# Altium PCB 131902115-潘怡君-PCB.PcbDoc
Units mil, origin at the board's own origin, x right, y up, seen from the top; angles counter-clockwise.
Board outline 5150 x 4030 mil, 2 copper layers (Top Layer, Bottom Layer); 38 components, 50 nets, 342 pads, 0 vias.
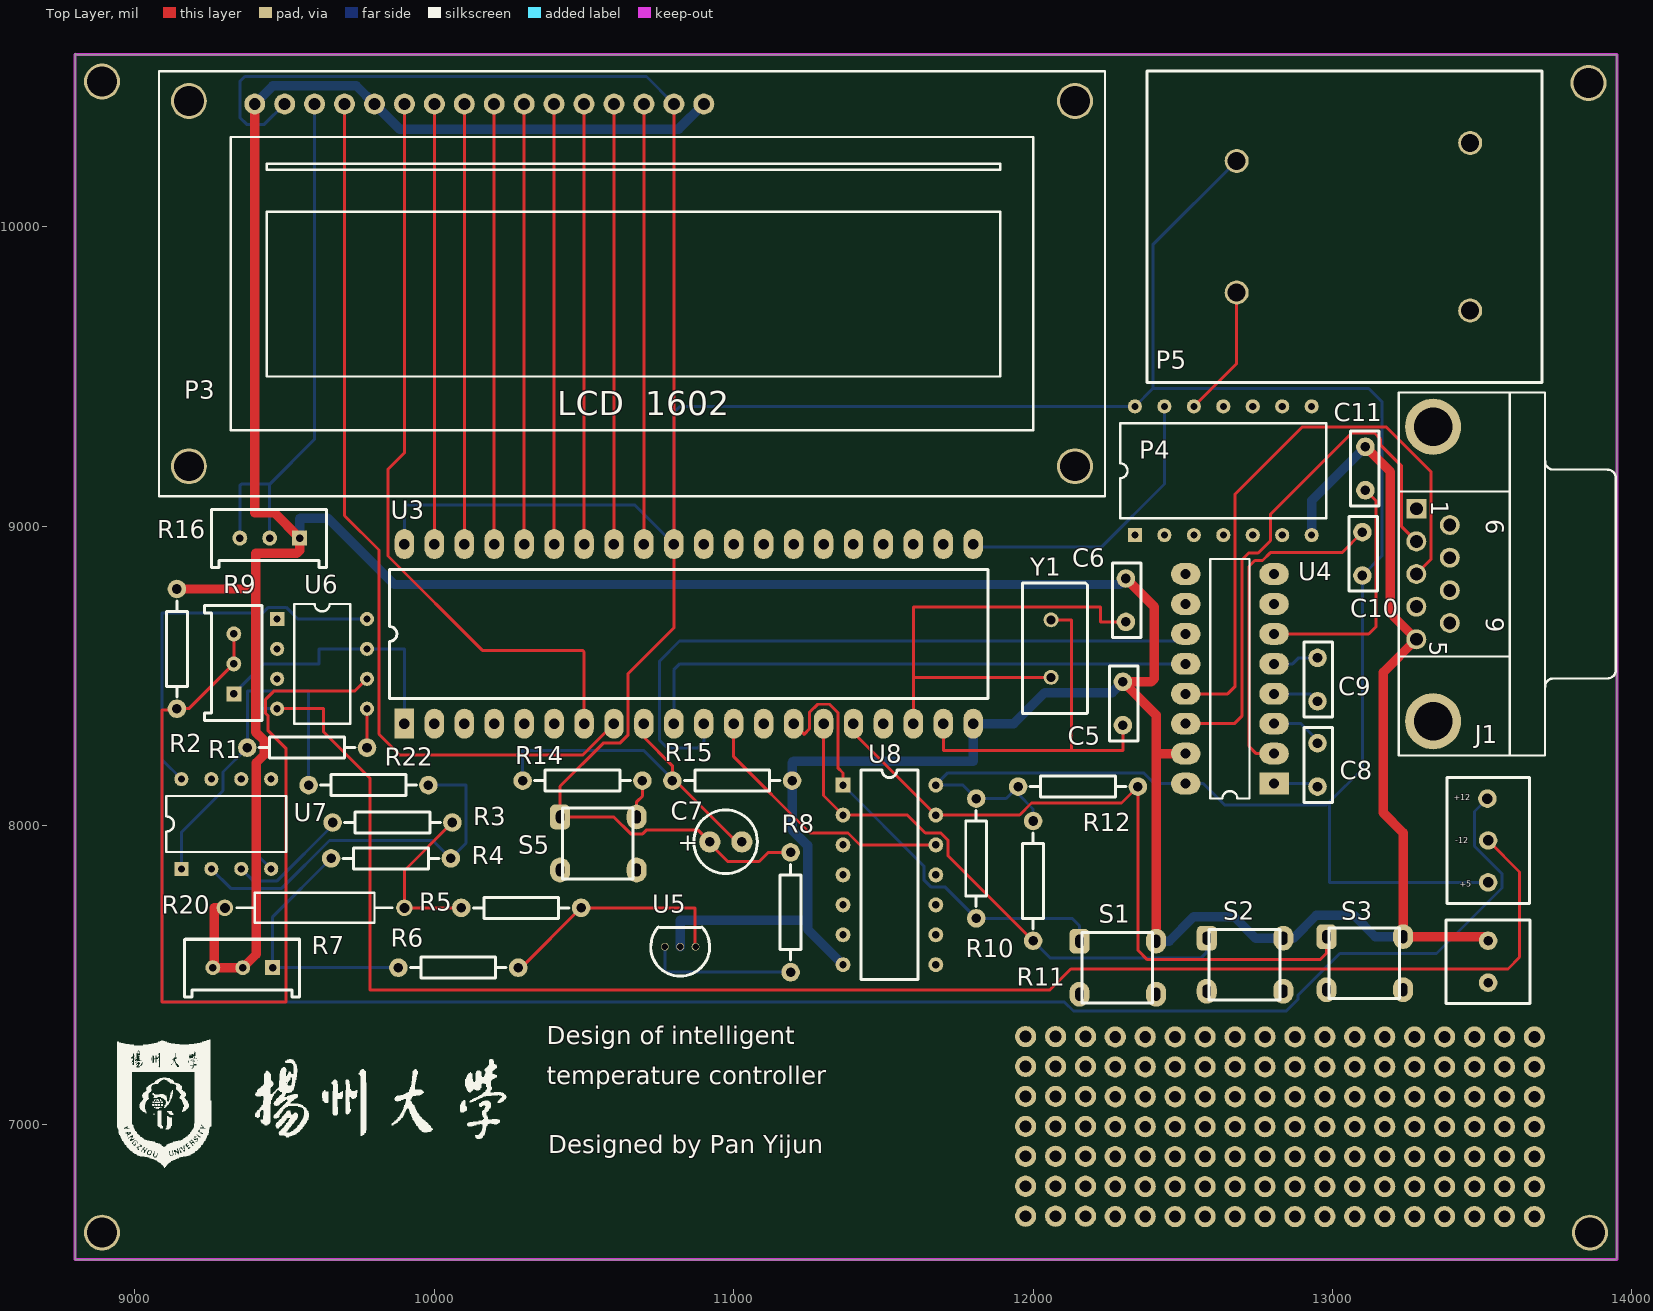
[diagram p0: Top Layer view]
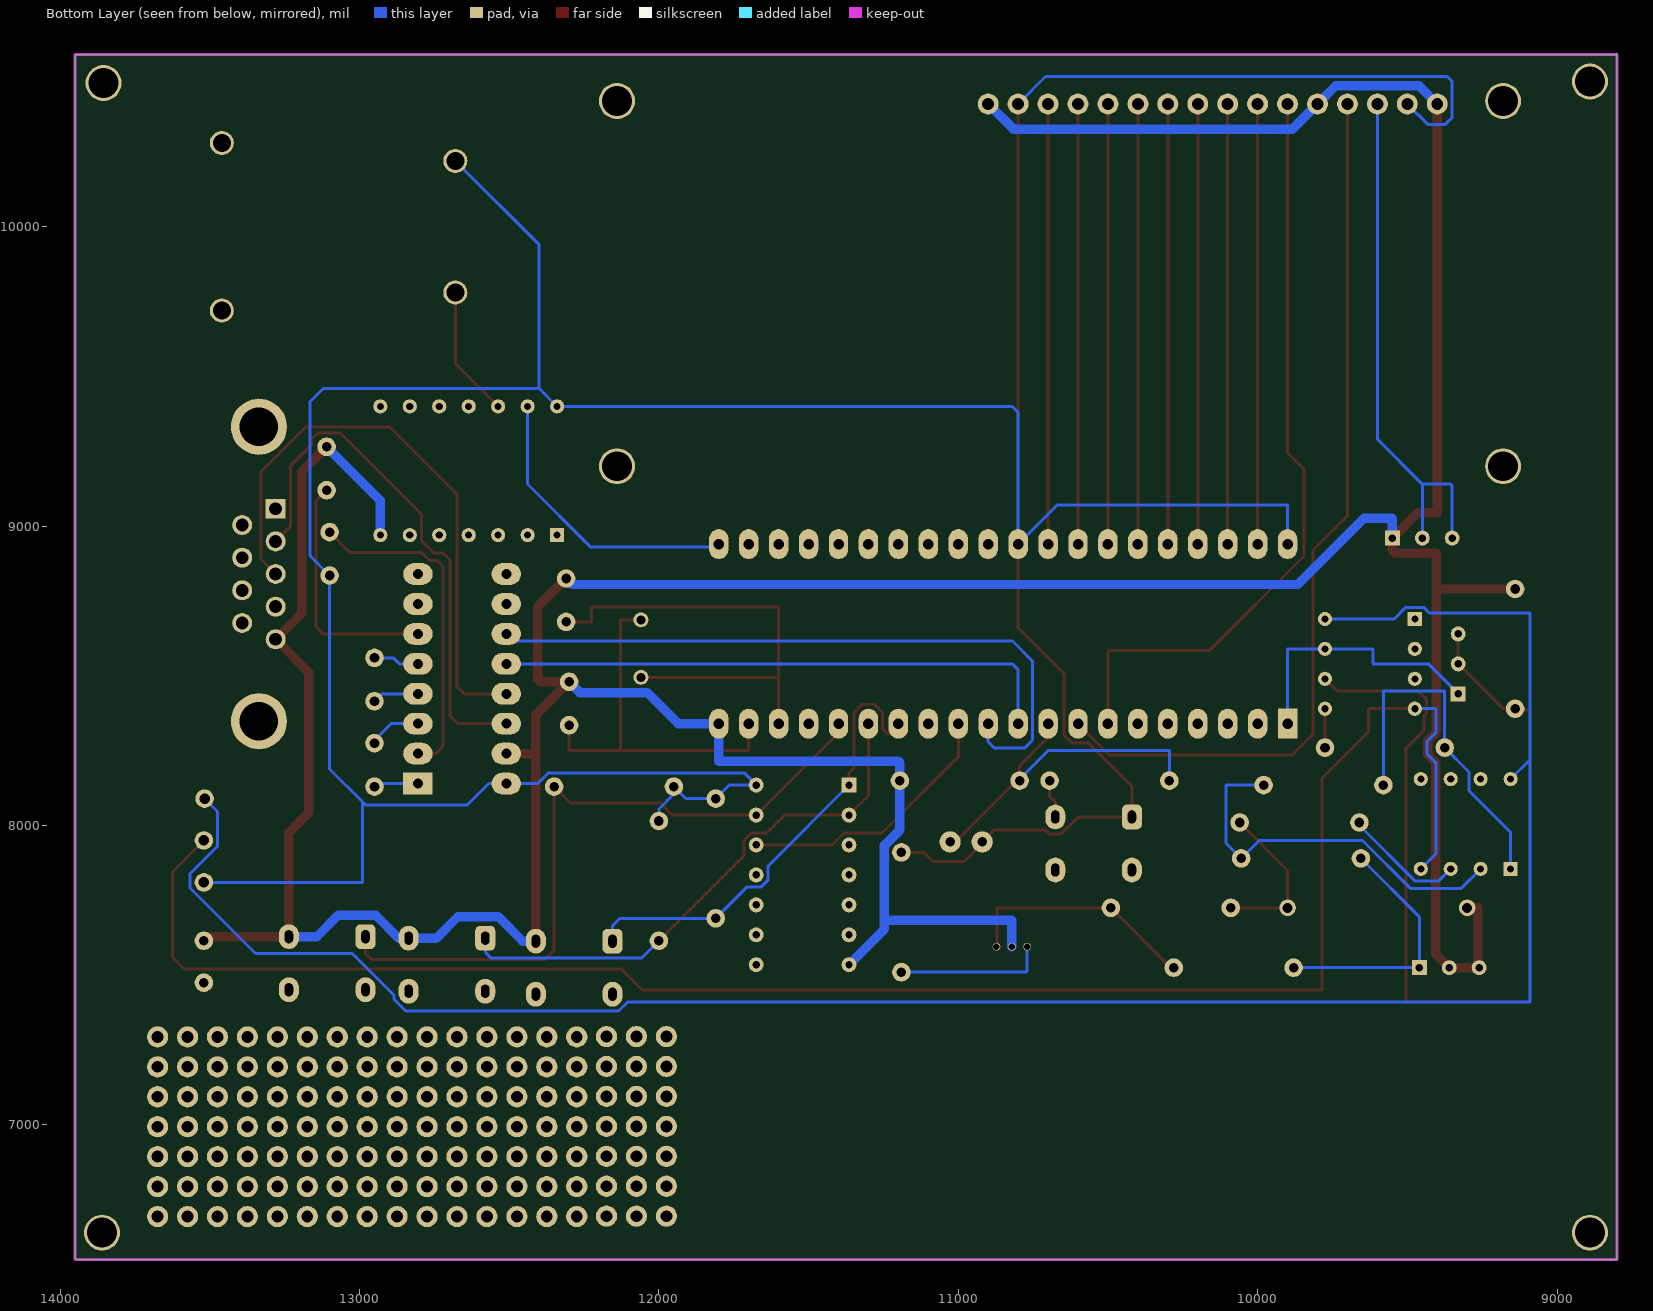
[diagram p1: Bottom Layer view, seen from below]

## Layer stack, top to bottom
Top Solder: solder mask 0.4, Solder Resist, Dk 3.5
Top Layer: signal copper 1.4
Dielectric 1: dielectric 12.6, FR-4, Dk 4.8
Bottom Layer: signal copper 1.4
Bottom Solder: solder mask 0.4, Solder Resist, Dk 3.5

## Board outline
8800,10580 8805,10575 13950,10575 13950,6555 13945,6550 8800,6550

## Design rules (kind name [scope] priority, off if disabled: settings)
Clearance [All] p1: gap=10
PolygonConnect [All] p1: connectstyle=Relief reliefconductorwidth=10 reliefentries=4 polygonreliefangle="90 Angle" airgapwidth=10
RoutingVias [All] p1: holewidth=28 width=50 viastyle="Through Hole" minholewidth=28 minwidth=50 maxholewidth=28 maxwidth=50
SolderMaskExpansion [All] p1: expansion=4
Width [InNet('GND')] p1: maxlimit=31.5 minlimit=31.5 preferedwidth=31.5 minimp=50.000000 maximp=50.000000 favimp=50.000000
30 further rules are at their usual default settings.

## Classes and differential pairs
component class 2: C5 C6 C7 C8 C9 C10 C11 J1 P3 P4 P5 R1 R3 R4 R5 R6 R7 R8 R9 R10 R11 R12 R14 R15 R16 R20 R22 S1 S2 S3 S5 U4 U5 U6 U7 U8

## Components (designator, comment, footprint, x,y, rotation, side; value= is the part's Value field where it differs from the comment)
C5 "Cap" dianrong 14115,9275 r270 top
C6 "Cap" dianrong 14125,9620 r270 top
C7 "Cap2" dianjiedianrong1/22uF 10920,7945 r0 top
C8 "" dianrong 14765,9070 r270 top
C9 "" dianrong 14765,9355 r270 top
C10 "" dianrong 14915,9775 r270 top
C11 "" dianrong 11295,8325 r90 top
J1 "D Connector 9" DSUB1.385-2H9 13710,8840 r270 top
P3 "LDC1602" "LCD 1602" 10660,9810 r0 top
P4 "74LS06" 7406 12340,8970 r90 top
P5 "SSR-25DA" ssr 13700,10520 r180 top
R1 "Res2" dianzu#1 9775,8260 r180 top
R2 "Res2" dianzu#2 9140,8390 r90 top
R3 "Res2" dianzu#1 9660,8010 r0 top
R4 "Res2" dianzu#1 10055,7890 r180 top
R5 "Res2" dianzu#1 10490,7725 r180 top
R6 "Res2" dianzu#1 10280,7525 r180 top
R7 "RPot" dianweqi 9310,7580 r180 top
R8 "Res2" dianzu#2 11190,7910 r270 top
R9 "RPot" dianweqi 9385,8590 r90 top
R10 "Res2" dianzu#2 11810,7690 r90 top
R11 "Res2" dianzu#2 12000,7615 r90 top
R12 "Res2" dianzu#2 12350,8130 r180 top
R14 "Res2" dianzu#2 10695,8150 r180 top
R15 "Res2" dianzu#2 11195,8150 r180 top
R16 "RPot" dianweqi 9400,9015 r180 top
R20 "Pt100" AXIAL-0.6 9600,7725 r180 top
R22 "Res2" dianzu#3 9980,8135 r180 top
S1 "SW-PB" anniu 12155,7525 r0 top
S2 "SW-PB" anniu 12580,7535 r0 top
S3 "SW-PB" anniu 12980,7540 r0 top
S5 "SW-PB" anniu 10420,7940 r0 top
U3 "STC12C5A60S2" "DIP40 - duplicate" 9900,8340 r90 top
U4 "MAX232ACPE" MAX232 12805,8140 r180 top
U5 "TL431ACLP" tl431 10770,7595 r0 top
U6 "LM358D" lm358 9475,8690 r0 top
U7 "LM358D" lm358 9155,7855 r90 top
U8 "74LS11" 74ls11 11365,8135 r0 top

## Footprints (in the part's own frame and the unit in brackets; to place one, negate y for a bottom-side part, rotate by r counter-clockwise, add the part's x,y. Pads: shape width x height; smd on the part's side, far side on the other; paste and mask are expansions set on the pad)
74ls11 [mil]
  rect 50x50 hole 25: 1(0,0)
  round 50 hole 25: 2(0,-100) 3(0,-200) 4(0,-300) 5(0,-400) 6(0,-500) 7(0,-600) 8(310,-600) 9(310,-500) 10(310,-400) 11(310,-300) 12(310,-200) 13(310,-100) 14(310,0)
  silkscreen extent 60,-650 250,50
7406 [mm]
  rect 1.2x1.2 hole 0.6: 1(0,0)
  round 1.2 hole 0.6: 2(0,-2.5) 3(0,-5) 4(0,-7.5) 5(0,-10) 6(0,-12.5) 7(0,-15) 8(10.92,-15) 9(10.92,-12.5) 10(10.92,-10) 11(10.92,-7.5) 12(10.92,-5) 13(10.92,-2.5) 14(10.92,0)
  silkscreen extent 1.43,-16.25 9.49,1.25
anniu [mm]
  rrect50% 1.7x2.1 hole 0.7 slot 1.1 at 90 deg: 1(0,2.25)
  oval 1.7x2.1 hole 0.7 slot 1.1 at 90 deg: 2(6.5,2.25) 3(0,-2.25) 4(6.5,-2.25)
  silkscreen extent 0.2,-3 6.2,3
AXIAL-0.6 [mm] "Variable Resistor; 2 Leads"
  round 1.4 hole 0.85: 1(-7.62,0) 2(7.62,0)
  silkscreen extent -6.6,-1.27 6.6,1.27
dianjiedianrong1/22uF [mm]
  round 1.8 hole 0.8: 1(0,0) 2(2.727,0)
  silkscreen extent -1.36,-2.69 4.04,2.71
dianrong [mil]
  round 62 hole 32: 1(795,-1815) 2(940,-1815)
  silkscreen extent 742,-1860 992,-1765
dianweqi [mil]
  rect 50x50 hole 25: 1(-150,55)
  round 50 hole 25: 2(-50,55) 3(50,55)
  silkscreen extent -240,-40 145,153
dianzu#1 [mil]
  round 62 hole 32: 1(0,0) 2(400,0)
  silkscreen extent 40,-35 360,35
dianzu#2 [mil]
  round 62 hole 32: 1(0,0) 1(400,0)
  silkscreen extent 40,-35 360,35
dianzu#3 [mil]
  round 62 hole 32: 1(400,0) 2(0,0)
  silkscreen extent 40,-35 360,35
"DIP40 - duplicate" [mil]
  rect 100x65 hole 35: 1(0,0)
  oval 100x65 hole 35: 2(0,-100) 3(0,-200) 4(0,-300) 5(0,-400) 6(0,-500) 7(0,-600) 8(0,-700) 9(0,-800) 10(0,-900) 11(0,-1000) 12(0,-1100) 13(0,-1200) 14(0,-1300) 15(0,-1400) 16(0,-1500) 17(0,-1600) 18(0,-1700) 19(0,-1800) 20(0,-1900) 21(600,-1900) 22(600,-1800) 23(600,-1700) 24(600,-1600) 25(600,-1500) 26(600,-1400) 27(600,-1300) 28(600,-1200) 29(600,-1100) 30(600,-1000) 31(600,-900) 32(600,-800) 33(600,-700) 34(600,-600) 35(600,-500) 36(600,-400) 37(600,-300) 38(600,-200) 39(600,-100) 40(600,0)
  silkscreen extent 85,-1950 515,50
DSUB1.385-2H9 [mm] "Connector; D Subminiature; 9 Position; Right Angle; Pitch 1.385 mm"
  rect 1.69x1.69 hole 1.09: 1(-5.54,-10.92)
  round 1.69 hole 1.09: 2(-2.77,-10.92) 3(0,-10.92) 4(2.77,-10.92) 5(5.54,-10.92) 6(-4.155,-8.08) 7(-1.385,-8.08) 8(1.385,-8.08) 9(4.155,-8.08)
  round 4.76 hole 3.26: 10(-12.495,-9.5) 11(12.495,-9.5)
  silkscreen extent -15.4,-12.4 15.4,6
"LCD 1602" [mil] "www.ouravr.com"
  round 120 hole 100: 0(-1480,-610) 0(-1480,610) 0(1480,-610) 0(1480,610)
  round 70 hole 40: 1(-1260,600) 2(-1160,600) 3(-1060,600) 4(-960,600) 5(-860,600) 6(-760,600) 7(-660,600) 8(-560,600) 9(-460,600) 10(-360,600) 11(-260,600) 12(-160,600) 13(-60,600) 14(40,600) 15(140,600) 16(240,600)
  silkscreen extent -1580,-710 1580,710
lm358 [mm]
  rect 1.2x1.2 hole 0.6: 1(0,0)
  round 1.2 hole 0.6: 2(0,-2.54) 3(0,-5.08) 4(0,-7.62) 5(7.62,-7.62) 6(7.62,-5.08) 7(7.62,-2.54) 8(7.62,0)
  silkscreen extent 1.43,-8.89 6.19,1.27
MAX232 [mm]
  rect 2.5x1.85 hole 0.85: 1(0,0)
  oval 2.5x1.85 hole 0.85: 2(0,-2.54) 3(0,-5.08) 4(0,-7.62) 5(0,-10.16) 6(0,-12.7) 7(0,-15.24) 8(0,-17.78) 9(7.5,-17.78) 10(7.5,-15.24) 11(7.5,-12.7) 12(7.5,-10.16) 13(7.5,-7.62) 14(7.5,-5.08) 15(7.5,-2.54) 16(7.5,0)
  silkscreen extent 2.08,-19.05 5.41,1.27
ssr [mil]
  round 80 hole 60: 0(240,240) 1(240,800) 2(1020,300) 3(1020,740)
  silkscreen extent 0,0 1320,1040
tl431 [mm]
  round 0.65 hole 0.55: 1(2.6,0) 2(1.3,0) 3(0,0)
  silkscreen extent -1.2,-2.5 3.8,1.69

## Part data
C5 C6 C7: "Capacitor"
C8 C9 C10 C11: library part Cap, "Capacitor"
J1: "Receptacle Assembly, 9 Position, Right Angle"
P3: library part "Header 16", "Header, 16-Pin"
P4: library part "Header 7X2", "Header, 7-Pin, Dual row"
P5: library part "Header 2X2", "Header, 2-Pin, Dual row"
R1 R2 R3 R4 R5 R6 R8 R10 R11 R12 R14 R15 R22: "Resistor"
R7 R9 R16: "Potentiometer"
R20: library part "Res Adj2", "Variable Resistor"
S1 S2 S3 S5: "Switch"
U3: library part AT89C52, "8-Bit Microcontroller with 8K Flash ROM"
U4: "+5V Powered, Multi-Channel RS-232 Driver/Receiver"
U5: "Programmable Precision Reference"
U6 U7: "Dual Low-Power Operational Amplifier"
U8: library part AND3, "3-Input AND Gate, Single Pin Version"

## Free pads (board coordinates)
  round 50 hole 30: 1(12060,8495) 2(12060,8687.13)
  round 62 hole 32: 1(13520,7475) 2(13520,7615)
  round 62 hole 35: 1(13520,7810) 2(13520,7950) 3(13517.5,8090)
  round 70.87 hole 39.37: 41(11975,6695) 41(12075,6695) 41(12175,6695) 41(12274.41,6693.9) 41(12374.41,6693.9) 41(12474.41,6693.9) 41(12574.41,6693.9) 41(12674.41,6693.9) 41(12774.41,6693.9) 41(12874.41,6693.9) 41(12974.41,6693.9) 41(13074.41,6693.9) 41(13174.41,6693.9) 41(13274.41,6693.9) 41(13374.41,6693.9) 41(13474.41,6693.9) 41(13574.41,6693.9) 41(13674.41,6693.9) 42(11975,6795) 42(12075,6795) 42(12175,6795) 42(12274.41,6793.9) 42(12374.41,6793.9) 42(12474.41,6793.9) 42(12574.41,6793.9) 42(12674.41,6793.9) 42(12774.41,6793.9) 42(12874.41,6793.9) 42(12974.41,6793.9) 42(13074.41,6793.9) 42(13174.41,6793.9) 42(13274.41,6793.9) 42(13374.41,6793.9) 42(13474.41,6793.9) 42(13574.41,6793.9) 42(13674.41,6793.9) 43(11975,6895) 43(12075,6895) 43(12175,6895) 43(12274.41,6893.9) 43(12374.41,6893.9) 43(12474.41,6893.9) 43(12574.41,6893.9) 43(12674.41,6893.9) 43(12774.41,6893.9) 43(12874.41,6893.9) 43(12974.41,6893.9) 43(13074.41,6893.9) 43(13174.41,6893.9) 43(13274.41,6893.9) 43(13374.41,6893.9) 43(13474.41,6893.9) 43(13574.41,6893.9) 43(13674.41,6893.9) 44(11975,6995) 44(12075,6995) 44(12175,6995) 44(12274.41,6993.9) 44(12374.41,6993.9) 44(12474.41,6993.9) 44(12574.41,6993.9) 44(12674.41,6993.9) 44(12774.41,6993.9) 44(12874.41,6993.9) 44(12974.41,6993.9) 44(13074.41,6993.9) 44(13174.41,6993.9) 44(13274.41,6993.9) 44(13374.41,6993.9) 44(13474.41,6993.9) 44(13574.41,6993.9) 44(13674.41,6993.9) 45(11975,7095) 45(12075,7095) 45(12175,7095) 45(12274.41,7093.9) 45(12374.41,7093.9) 45(12474.41,7093.9) 45(12574.41,7093.9) 45(12674.41,7093.9) 45(12774.41,7093.9) 45(12874.41,7093.9) 45(12974.41,7093.9) 45(13074.41,7093.9) 45(13174.41,7093.9) 45(13274.41,7093.9) 45(13374.41,7093.9) 45(13474.41,7093.9) 45(13574.41,7093.9) 45(13674.41,7093.9) 46(11975,7195) 46(12075,7195) 46(12175,7195) 46(12274.41,7193.9) 46(12374.41,7193.9) 46(12474.41,7193.9) 46(12574.41,7193.9) 46(12674.41,7193.9) 46(12774.41,7193.9) 46(12874.41,7193.9) 46(12974.41,7193.9) 46(13074.41,7193.9) 46(13174.41,7193.9) 46(13274.41,7193.9) 46(13374.41,7193.9) 46(13474.41,7193.9) 46(13574.41,7193.9) 46(13674.41,7193.9) 47(11975,7295) 47(12075,7295) 47(12175,7295) 47(12274.41,7293.9) 47(12374.41,7293.9) 47(12474.41,7293.9) 47(12574.41,7293.9) 47(12674.41,7293.9) 47(12774.41,7293.9) 47(12874.41,7293.9) 47(12974.41,7293.9) 47(13074.41,7293.9) 47(13174.41,7293.9) 47(13274.41,7293.9) 47(13374.41,7293.9) 47(13474.41,7293.9) 47(13574.41,7293.9) 47(13674.41,7293.9)
  round 120 hole 100: 48(8890,10485) 49(13855,10480) 51(13860,6640) 52(8890,6640)

## Nets (pads, with @x,y where several pads share a name; then routed paths per layer and width w, separated by ;. In a path a pad name is that pad's centre, name@x,y a point inside that pad or via, vN(x,y) a via of type N, cw(c..) or ccw(c..) an arc to the next point about the centre after c; other vN are vias at no path point)
GND: C5.1 C6.1 C11.2 J1.5 P3.1 P3.5 P3.16 P4.7 pad.2@13520,7615 R2.1@9140,8790 R7.2 R7.3 R15.1@11195,8150 R16.1 R20.2 S1.2 S2.2 S3.2 U3.20 U4.15 U5.2 U8.7 | length 15746.9
  Top Layer w31.5: R2.1@9140,8790 9398,8790 9403,8795 ; R20.2 9265,7725 9265,7530 R7.3 R7.2 9405,7570 9405,8209.75 9431.75,8236.49 9431.75,8283.51 9403,8312.25 9403,8795 ; P3.1 9400,9045 9465,9045 R16.1 9550,8918.5 9540.75,8909.25 9403,8909.25 9403,8795 ; C6.1 12405,8730 12405,8490 12395,8480 C5.1 12410.91,8369.09 S1.2 ; 12415,8240 U4.15 ; C11.2 13193,9182 13193,8708.97 J1.5 13170,8511.81 13170,8041.91 13235.91,7976 S3.2 13506.42,7628.58 pad.2@13520,7615
  Bottom Layer w31.5: P3.1 9460.75,10470.75 9739.25,10470.75 P3.5 9884,10326 10816,10326 P3.16 ; R16.1 9550,9025 9552,9027 9644,9027 9866,8805 12290,8805 C6.1 ; U5.2 10821.18,7683.82 11242.93,7683.82 11246.75,7680 ; U8.7 11246.75,7653.25 11246.75,7680 ; C5.1 12264,8444 12039,8444 11935,8340 U3.20 11800,8215 11200,8215 11195,8210 11195,8150 11195,7985.25 11246.75,7933.51 11246.75,7680 ; S1.2 12454.58,7613.58 12536,7695 12671.58,7695 12743,7623.58 S2.2 12869.58,7623.58 12946,7700 13071.58,7700 13143,7628.58 S3.2 ; P4.7 12930.55,9085.55 C11.2
NetC1_1: R9.1 U3.1 U6.7 | length 911.4
  Bottom Layer w10: R9.1 9430,8540 9615,8540 9615,8590 U6.7 9900,8590 U3.1
NetC1_2: P3.6 U3.7 | length 2560.3
  Top Layer w10: P3.6 9900,9245 9845,9190 9845,8900 10160,8585 10495,8585 10500,8580 U3.7
NetC2_2: P3.4 U3.8 | length 3010.1
  Top Layer w10: P3.4 9700,9035 9815,8920 9815,8305 9885,8235 10495,8235 U3.8
NetC5_2: C5.2 pad.2@12060,8687.13 U3.19 | length 1280
  Top Layer w10: U3.19 11700,8250 12300,8250 C5.2 ; pad.2@12060,8687.13 12127.87,8687.13 12127.87,8250
NetC6_2: C6.2 pad.1@12060,8495 U3.18 | length 1610
  Top Layer w10: U3.18 11600,8495 ; pad.1@12060,8495 11600,8495 ; C6.2 12225,8680 12225,8730 11600,8730 11600,8495
NetC7_2: C7.2 R14.1@10295,8150 R15.1@10795,8150 U3.9 | length 1191
  Top Layer w10: U3.9 10700,8295 10795,8200 10795,8150 10805,8150 11010,7945 C7.2
  Bottom Layer w10: R14.1@10295,8150 10295,8250 10700,8250 10795,8155 R15.1@10795,8150
NetC8_1: C8.1 U4.3 | length 174.9
  Bottom Layer w10: U4.3 12895,8340 C8.1@12955,8280
NetC8_2: C8.2 U4.1 | length 149.1
  Bottom Layer w10: U4.1 12940,8140 C8.2
NetC9_1: C9.1 U4.5 | length 153.3
  Bottom Layer w10: U4.5 12867,8540 12887,8560 C9.1
NetC9_2: C9.2 U4.4 | length 155.4
  Bottom Layer w10: U4.4 12925,8440 C9.2
NetC10_1: C10.1 U4.2 | length 1121.4
  Top Layer w10: U4.2 12745.79,8240 12720.79,8265 12720.79,8865 12740.79,8885 12765.9,8885 12792.32,8911.42 13031.42,8911.42 C10.1
NetC11_1: C11.1 U4.6 | length 821.3
  Top Layer w10: U4.6 13121,8640 13146,8665 13146,9084 C11.1
NetD1_1: pad.3 U6.8 U7.8 | length 7122.4
  Bottom Layer w10: U7.8 9090,8220 ; U6.8 9543.46,8690 9504.84,8728.62 9445.16,8728.62 9426.54,8710 9090,8710 9090,8220 ; pad.3 13474,8046.5 13474,7930.95 13566,7838.95 13566,7790.95 13347.3,7572.24 13024.41,7572.24 12884.37,7432.2 12884.37,7418.47 12845.98,7380.08 12134.93,7380.08 12105,7410 9090,7410 9090,8220
NetD1_2: pad.2@13520,7950 U6.4 U7.4 | length 6128.8
  Top Layer w10: U6.4 9630,8390 9630,8313 9785,8158 9785,7450 12055,7450 12126,7521 13586,7521 13625,7560 13625,7845 pad.2@13520,7950
  Bottom Layer w10: U7.4 9405,7905 9405,8210 9435,8240 9435,8280 9405,8310 9405,8390 U6.4
NetD1_3: 
NetD1_4: 
NetF?_1: 
NetJ1_2: J1.2 U4.14 | length 1810.1
  Top Layer w10: U4.14 12672,8340 12697,8365 12697,8887 12720,8910 12751.62,8910 12793,8951.38 12793,9040 13064,9311 13140,9311 13161,9290 13161,9270 13231,9200 13231,8998.13 J1.2
NetJ1_3: J1.3 U4.13 | length 1988.4
  Top Layer w10: U4.13 12650,8440 12675,8465 12675,9107 12899,9331 13180,9331 13329,9182 13329,8888.92 J1.3
NetP3_3: P3.3 R16.2 R16.3 | length 1789.2
  Bottom Layer w10: R16.3 9350,9135 9355,9140 9450,9140 ; R16.2 9450,9140 ; P3.3 9600,9290 9450,9140
NetP3_7: P3.7 U3.39 | length 1470
  Top Layer w10: U3.39 P3.7
NetP3_8: P3.8 U3.38 | length 1470
  Top Layer w10: U3.38 P3.8
NetP3_9: P3.9 U3.37 | length 1470
  Top Layer w10: U3.37 P3.9
NetP3_10: P3.10 U3.36 | length 1470
  Top Layer w10: U3.36 P3.10
NetP3_11: P3.11 U3.35 | length 1470
  Top Layer w10: U3.35 P3.11
NetP3_12: P3.12 U3.34 | length 1470
  Top Layer w10: U3.34 P3.12
NetP3_13: P3.13 U3.33 | length 1470
  Top Layer w10: U3.33 P3.13
NetP3_14: P3.14 U3.32 | length 1470
  Top Layer w10: U3.32 P3.14
NetP4_11: P4.11
NetP4_13: P4.13 U3.21 | length 994.5
  Bottom Layer w10: U3.21 11800,8931 12229,8931 12439,9141 12439,9399.92 P4.13
NetP5_2: P4.12 P5.3 | length 439.4
  Top Layer w10: P4.12 12680,9543.07 P5.3
NetR1_1: R1.1 U6.5 | length 130
  Top Layer w10: R1.1 U6.5
NetR1_2: R1.2 R22.1 U7.1 | length 1206.1
  Bottom Layer w10: U7.1 9155,7977.76 9293.62,8116.38 9293.62,8178.62 R1.2 9375,8450 9580,8450 R22.1
NetR2_1: 
NetR3_1: R3.1 U7.3 | length 408.2
  Bottom Layer w10: U7.3 9395,7815 9475,7815 9660,8000 R3.1
NetR3_2: R3.2 R5.2 R20.1 | length 541.3
  Top Layer w10: R3.2 9900,7850 R20.1 R5.2
NetR4_1: R4.1 R22.2 U7.2 | length 1310.2
  Bottom Layer w10: U7.2 9320,7790 9489.95,7790 9649.95,7950 9995,7950 R4.1 10106,7941 10106,8135 R22.2
NetR4_2: R5.1 R6.1 U5.1 | length 803.8
  Top Layer w10: R6.1 10290,7525 R5.1 10870,7725 10870,7597.36 U5.1
NetR5_2: R8.1@11190,7510 U5.3 | length 502.1
  Bottom Layer w10: U5.3 10770,7515 10775,7510 R8.1@11190,7510
NetR9_2: R2.1@9140,8390 R9.2 R9.3 U6.6 | length 3201.1
  Top Layer w10: R9.3 R9.2 9180,8390 9140,8390 9135,8385 9090,8385 9090,7410 9505,7410 9505,8256.38 9445,8316.38 9445,8365.38 9436.38,8374 9436.38,8421.38 9465,8450 9735,8450 U6.6
NetR10_1: R10.1@11810,7690 S1.1 U3.14 U8.1 | length 1560.3
  Top Layer w10: U3.14 11235.27,8304.73 11252.5,8321.97 11252.5,8377.18 11280.32,8405 11319.68,8405 11347.5,8377.18 11347.5,8192.5 11365,8175 U8.1
  Bottom Layer w10: U8.1 11635,7865 11635,7818.43 11658.43,7795 11705,7795 11810,7690 12130,7690 12155,7665 S1.1
NetR11_1: R11.1@12000,7615 S2.1 U3.15 U8.2 | length 1830
  Top Layer w10: U3.15 11300,8100 U8.2 11580,8035 11640,7975 11691.57,7975 11715,7951.57 11715,7900 R11.1@12000,7615
  Bottom Layer w10: R11.1@12000,7615 12058,7557 12560,7557 12580,7577 S2.1
NetR12_1: R12.1@12350,8130 S3.1 U3.16 U8.13 | length 2386.6
  Top Layer w10: U3.16 11400,8310 U8.13 11954.95,8035 11994.95,8075 12295,8075 12350,8130 12350,7583 12380,7553 12960,7553 12980,7573 S3.1
NetR14_1: R14.1@10695,8150 S5.2 | length 129.3
  Top Layer w10: S5.2 10675.91,8079 10695,8098.09 R14.1@10695,8150
NetR20_1: R4.2 R6.2 R7.1 | length 865.8
  Bottom Layer w10: R4.2 9460,7695 R7.1 R6.2
NetU3_10: U3.10 U4.12 | length 1898
  Bottom Layer w10: U3.10 10800,8520 10820,8540 U4.12
NetU3_11: U3.11 U4.11 | length 2301.5
  Bottom Layer w10: U3.11 10900,8279 10880,8259 10778,8259 10752,8285 10752,8549 10819,8616 12497,8616 12497,8640 U4.11
NetU3_12: U3.12 U8.12 | length 907.2
  Top Layer w10: U3.12 11000,8230 11255,7975 11381.57,7975 11421.57,7935 U8.12
VCC: C7.1 C10.2 P3.2 P3.15 P4.14 P5.2 pad.1@13520,7810 R8.1@11190,7910 R10.1@11810,8090 R11.1@12000,8015 R12.1@11950,8130 S5.1 U3.31 U3.40 U4.16 U8.14 | length 14083.4
  Top Layer w10: P3.15 U3.31 10800,8660 10647.5,8507.5 10647.5,8302.82 10619.68,8275 10564,8275 10420,8131 S5.1 10599.49,8028.58 10655.83,7972.24 10695.98,7972.24 10709.17,7985.43 10879.57,7985.43 C7.1 10920,7940 10980,7880 11085,7880 11115,7910 R8.1@11190,7910
  Bottom Layer w10: P3.2 9432,10342 9373,10342 9350,10365 9350,10485 9366.75,10501.75 10708.25,10501.75 P3.15 ; U3.40 9900,9070 10670,9070 U3.31 10800,9379.92 10820,9399.92 P4.14 12400.08,9460 ; R11.1@12000,8015 12000,8055 11950,8105 11950,8130 11910,8090 11810,8090 11765,8135 U8.14 11675,8136 11715,8176 12369.05,8176 12405.05,8140 U4.16 12568,8140 12639,8069 12980,8069 12990,8079 ; P5.2 12400.08,9940.08 12400.08,9460 ; pad.1@13520,7810 12990,7810 12990,8079 ; 12400.08,9460 13121,9460 13165,9416 13165,8900 C10.2 13100,8189 12990,8079
pads on no net: J1.1 J1.4 J1.6 J1.7 J1.8 J1.9 J1.10 J1.11 P3.0 P4.1 P4.2 P4.3 P4.4 P4.5 P4.6 P4.8 P4.9 P4.10 P5.0 P5.1 S1.3 S1.4 S2.3 S2.4 S3.3 S3.4 S5.3 S5.4 U3.2 U3.3 U3.4 U3.5 U3.6 U3.13 U3.17 U3.22 U3.23 U3.24 U3.25 U3.26 U3.27 U3.28 U3.29 U3.30 U4.7 U4.8 U4.9 U4.10 U6.1 U6.2 U6.3 U7.5 U7.6 U7.7 U8.3 U8.4 U8.5 U8.6 U8.8 U8.9 U8.10 U8.11

## Keep-outs
Keep-Out Layer:
  lines w10: 8805,4755 8805,4770 ; 14935,10580 14940,10575 ; 21405,10585 21410,10590 ; 8800,6550 13950,6550 13950,10575 8800,10575 8800,6550

## Silkscreen, mask and mechanical layers (free items; w line width, h text height)
Top Overlay:
  drawing of 2076 lines, arcs and shapes, not listed
  text "Y1" at 11990,8835 h60
  text "+12" at 13405,8085 h20
  text "-12" at 13410,7940 h20
  text "+5" at 13425,7795 h20
  text "Design of intelligent" at 10375,7270 h60
  text "temperature controller" at 10375,7135 h60
  text "Designed by Pan Yijun" at 10380,6905 h60

## Text inside footprints (layer, text, board x,y; h text height)
C7: Top Overlay "+" at 10812.8,7915.47 h60
J1: Top Overlay "1" at 13330,9085 h59.06 r270; Top Overlay "5" at 13325,8615 h59.06 r270; Top Overlay "9" at 13514.13,8696.1 h59.06 r270; Top Overlay "6" at 13514.13,9023.27 h59.06 r270
P3: Top Overlay "LCD  1602" at 10410,9370 h80